# EAGLE board CT_schematic (EAGLE 7.6.0)

Size 100 x 80 mm. Coordinates in mm from the lower left corner, seen from the top.
Outline: 0,0 100,0 100,80 0,80 0,0
Copper layers (1*16): Top 0.035mm / dielectric 1.5mm / Bottom 0.035mm
Design rules "default": minimum track width 10mil, minimum drill 24mil, track to track 8mil, track to pad 8mil, pad to pad 8mil, via to via 8mil, smd to smd 8mil, copper to edge 40mil, drill to drill 8mil, minimum pad ring 10mil, minimum via ring 8mil, stop-mask expansion 4mil, vias tented up to drill 0mil, thermal gap 10mil

## Footprints (pad centres in the part's own frame; a part is rotated, then mirrored left to right if it is on the bottom)
C0603 = smd 0.8 x 0.8: 1 -0.762,0; 2 0.762,0
C0402 = smd 0.5 x 0.5: 1 -0.508,0; 2 0.508,0
C1210 = smd 1.2 x 2.5: 1 -1.524,0; 2 1.524,0
EXV-9H = smd 3.505 x 1.676: 1 -2.857,0; 2 2.857,0
L0603 = smd 0.8 x 0.8: 1 -0.762,0; 2 0.762,0
PJ-037B_PACKAGE = drill 3.7 square: 1 12,0 | drill 3.2 square: 2 6,0
R0603 = smd 0.8 x 0.8: 1 -0.762,0; 2 0.762,0
LFBGA100 = smd 0.52 x 0.52: A1 -3.6,3.6; A2 -2.8,3.6; A3 -2,3.6; A4 -1.2,3.6; A5 -0.4,3.6; A6 0.4,3.6; A7 1.2,3.6; A8 2,3.6; A9 2.8,3.6; A10 3.6,3.6; B1 -3.6,2.8; B2 -2.8,2.8; B3 -2,2.8; B4 -1.2,2.8; B5 -0.4,2.8; B6 0.4,2.8; B7 1.2,2.8; B8 2,2.8; B9 2.8,2.8; B10 3.6,2.8; C1 -3.6,2; C2 -2.8,2; C3 -2,2; C4 -1.2,2; C5 -0.4,2; C6 0.4,2; C7 1.2,2; C8 2,2; C9 2.8,2; C10 3.6,2; D1 -3.6,1.2; D2 -2.8,1.2; D3 -2,1.2; D4 -1.2,1.2; D5 -0.4,1.2; D6 0.4,1.2; D7 1.2,1.2; D8 2,1.2; D9 2.8,1.2; D10 3.6,1.2; E1 -3.6,0.4; E2 -2.8,0.4; E3 -2,0.4; E4 -1.2,0.4; E5 -0.4,0.4; E6 0.4,0.4; E7 1.2,0.4; E8 2,0.4; E9 2.8,0.4; E10 3.6,0.4; F1 -3.6,-0.4; F2 -2.8,-0.4; F3 -2,-0.4; F4 -1.2,-0.4; F5 -0.4,-0.4; F6 0.4,-0.4; F7 1.2,-0.4; F8 2,-0.4; F9 2.8,-0.4; F10 3.6,-0.4; G1 -3.6,-1.2; G2 -2.8,-1.2; G3 -2,-1.2; G4 -1.2,-1.2; G5 -0.4,-1.2; G6 0.4,-1.2; G7 1.2,-1.2; G8 2,-1.2; G9 2.8,-1.2; G10 3.6,-1.2; H1 -3.6,-2; H2 -2.8,-2; H3 -2,-2; H4 -1.2,-2; H5 -0.4,-2; H6 0.4,-2; H7 1.2,-2; H8 2,-2; H9 2.8,-2; H10 3.6,-2; J1 -3.6,-2.8; J2 -2.8,-2.8; J3 -2,-2.8; J4 -1.2,-2.8; J5 -0.4,-2.8; J6 0.4,-2.8; J7 1.2,-2.8; J8 2,-2.8; J9 2.8,-2.8; J10 3.6,-2.8; K1 -3.6,-3.6; K2 -2.8,-3.6; K3 -2,-3.6; K4 -1.2,-3.6; K5 -0.4,-3.6; K6 0.4,-3.6; K7 1.2,-3.6; K8 2,-3.6; K9 2.8,-3.6; K10 3.6,-3.6
SSOP-28 = smd 1.5 x 0.4: 1 -3.625,4.225; 2 -3.625,3.575; 3 -3.625,2.925; 4 -3.625,2.275; 5 -3.625,1.625; 6 -3.625,0.975; 7 -3.625,0.325; 8 -3.625,-0.325; 9 -3.625,-0.975; 10 -3.625,-1.625; 11 -3.625,-2.275; 12 -3.625,-2.925; 13 -3.625,-3.575; 14 -3.625,-4.225; 15 3.625,-4.225; 16 3.625,-3.575; 17 3.625,-2.925; 18 3.625,-2.275; 19 3.625,-1.625; 20 3.625,-0.975; 21 3.625,-0.325; 22 3.625,0.325; 23 3.625,0.975; 24 3.625,1.625; 25 3.625,2.275; 26 3.625,2.925; 27 3.625,3.575; 28 3.625,4.225
182-009-MALE = drill 1.194 pad 1.524 octagon: 1 -5.537,10.923; 2 -2.769,10.923; 3 0,10.923; 4 2.769,10.923; 5 5.537,10.923; 6 -4.153,8.08; 7 -1.384,8.08; 8 1.384,8.08; 9 4.153,8.08 | hole 3.048: -12.446,9.501; 12.446,9.501
FCI_10118193-0001LF = smd 0.4 x 1.35: 1 -1.3,2.675; 2 -0.65,2.675; 3 0,2.675; 4 0.65,2.675; 5 1.3,2.675 | smd 1.6 x 1.4: 6 -3.2,2.45; 7 3.2,2.45 | smd 1.9 x 1.9: 8 -1.2,0; 9 1.2,0 | hole 0.5: -3.3,0; 3.3,0
SOT143B = smd 1 x 0.7: 1 -0.75,-1 | smd 0.6 x 0.7: 2 0.95,-1; 3 0.95,1; 4 -0.95,1
ABLS-25.000MHZ-B2F-T = smd 5.6 x 2.8: 1 -3.81,0; 2 5.69,0
ASEK = smd 1.4 x 1: 1 -1.1,-0.8; 2 1.1,-0.8; 3 1.1,0.8; 4 -1.1,0.8
WSON-8 = smd 0.3 x 0.6: 1 -0.75,0; 2 0.05,0; 3 0.85,0; 4 1.65,0; 5 1.65,3.8; 6 0.85,3.8; 7 0.05,3.8; 8 -0.75,3.8 | smd 3 x 2.6: PAD 0.45,1.9
SON-6 = smd 0.55 x 0.3: 1 -0.355,0.5 | smd 0.52 x 0.3: 2 -0.37,0; 3 -0.37,-0.5; 4 0.37,-0.5; 5 0.37,0; 6 0.37,0.5
SW_4-1437565-2 = smd 1.4 x 2.1: 1 -2.23,4.55; 2 -2.23,-4.55; 3 2.23,4.55; 4 2.23,-4.55
LGM67K-G1J2-24-Z = smd 0.8 x 1.4: A -2,0; C 0,0
NC7SZ125M5X = smd 1.3 x 0.7: 1 -1.3,0.95; 2 -1.3,0; 3 -1.3,-0.95; 4 1.3,-0.95; 5 1.3,0.95
DUMMY_PACKAGE_110 = drill 0.3: 1 0,-1; 2 1.5,-1; 3 3,-1

## Placement (x,y rotation side)
C1  1e-06  [C0603]  -15.24,62.23 0 top  (outside the outline)
C2  1e-07  [C0603]  -19.05,62.23 0 top  (outside the outline)
C3  1e-07  [C0603]  -22.86,62.23 0 top  (outside the outline)
C4  1e-07  [C0603]  -26.67,62.23 0 top  (outside the outline)
C5  1e-07  [C0603]  -30.48,62.23 0 top  (outside the outline)
C6  1e-07  [C0603]  -34.29,62.23 0 top  (outside the outline)
C7  1e-07  [C0603]  -38.1,62.23 0 top  (outside the outline)
C8  4.7e-06  [C0603]  -68.58,55.88 0 top  (outside the outline)
C9  1e-08  [C0603]  -41.91,62.23 0 top  (outside the outline)
C10  1e-06  [C0603]  -45.72,62.23 0 top  (outside the outline)
C11  1e-11  [C0402]  -15.24,67.31 0 top  (outside the outline)
C12  1e-11  [C0402]  -19.05,67.31 0 top  (outside the outline)
C13  1e-07  [C0402]  -22.86,67.31 0 top  (outside the outline)
C14  1e-07  [C0402]  -26.67,67.31 0 top  (outside the outline)
C15  1e-07  [C0402]  -30.48,67.31 0 top  (outside the outline)
C16  1e-07  [C0402]  -34.29,67.31 0 top  (outside the outline)
C17  1e-07  [C0402]  -38.1,67.31 0 top  (outside the outline)
C18  1e-08  [C0402]  -41.91,67.31 0 top  (outside the outline)
C19  1e-08  [C0402]  -45.72,67.31 0 top  (outside the outline)
C20  1e-05  [C1210]  -16.51,57.15 0 top  (outside the outline)
C21  1e-05  [C1210]  -22.86,57.15 0 top  (outside the outline)
C22  1e-07  [C0402]  -49.53,67.31 0 top  (outside the outline)
C23  0.0001  [EXV-9H]  -17.78,49.53 0 top  (outside the outline)
C24  0.0001  [EXV-9H]  -29.21,49.53 0 top  (outside the outline)
C25  1e-08  [C0402]  -53.34,67.31 0 top  (outside the outline)
F1  240.0  [L0603]  -49.53,62.23 0 top  (outside the outline)
J1  PJ-037B  [PJ-037B_PACKAGE]  -43.18,29.21 0 top  (outside the outline)
R2  1000.0  [R0603]  -53.34,62.23 0 top  (outside the outline)
R4  4700.0  [R0603]  -57.15,62.23 0 top  (outside the outline)
R5  10000.0  [R0603]  -54.61,55.88 0 top  (outside the outline)
R6  100000.0  [R0603]  -34.29,55.88 0 top  (outside the outline)
R7  100000.0  [R0603]  -39.37,55.88 0 top  (outside the outline)
R8  2231.0  [R0603]  -60.96,62.23 0 top  (outside the outline)
R9  1000.0  [R0603]  -64.77,62.23 0 top  (outside the outline)
R10  10000.0  [R0603]  -59.69,55.88 0 top  (outside the outline)
R11  10000.0  [R0603]  -64.77,55.88 0 top  (outside the outline)
R12  9100.0  [R0603]  -68.58,62.23 0 top  (outside the outline)
R13  680000.0  [R0603]  -44.45,55.88 0 top  (outside the outline)
R14  120000.0  [R0603]  -49.53,55.88 0 top  (outside the outline)
U1  stm32f103v8h7  [LFBGA100]  -22.86,29.21 0 top  (outside the outline)
U2  ST3241EBPR  [SSOP-28]  -58.42,7.62 0 top  (outside the outline)
U3  182-009-113R531  [182-009-MALE]  -36.83,6.35 0 top  (outside the outline)
U4  10118193-0001LF  [FCI_10118193-0001LF]  -38.1,40.64 0 top  (outside the outline)
U5  prtr5v0u2ax  [SOT143B]  -66.04,67.31 0 top  (outside the outline)
U6  ABLS-25.000MHZ-B2F-T  [ABLS-25.000MHZ-B2F-T]  -48.26,49.53 0 top  (outside the outline)
U7  ASEK-32.768KHz-ECST  [ASEK]  -59.69,40.64 0 top  (outside the outline)
U8  LP3878SDX-ADJ/NOPB  [WSON-8]  -30.48,39.37 0 top  (outside the outline)
U9  TPS3895ADRYR  [SON-6]  -20.32,71.12 0 top  (outside the outline)
U10  4-1437565-2  [SW_4-1437565-2]  -59.69,27.94 0 top  (outside the outline)
U11  Q65110A2395  [LGM67K-G1J2-24-Z]  -59.69,49.53 0 top  (outside the outline)
U12  nc7sz125m5x  [NC7SZ125M5X]  -27.94,55.88 0 top  (outside the outline)
U13  Dummy  [DUMMY_PACKAGE_110]  -17.78,72.39 0 top  (outside the outline)

## Library data of the parts
C1-C25 F1 J1 R2 R4-R14 U1-U13 = circuit_tree

## Nets
CLK_CRYSTAL_U1_C1: C11.1 U1.C1 U6.1
CLK_CRYSTAL_U1_D1: C12.1 U1.D1 U6.2
CLK_U1_A1: U1.A1 U7.3
GND: C1.2 C2.2 C3.2 C4.2 C5.2 C6.2 C7.2 C8.2 C9.2 C10.2 C11.2 C12.2 C13.2 C16.2 C17.2 C18.2 C19.2 C20.2 C21.2 C22.2 C23.2 C24.2 C25.2 J1.2 R2.2 R5.2 R9.2 R12.2 R14.2 U1.C2 U1.E4 U1.E5 U1.E6 U1.E7 U1.G1 U1.H1 U2.23 U2.25 U3.5 U4.5 U4.6 U4.7 U4.8 U4.9 U5.1 U7.2 U8.3 U8.PAD U9.2 U11.C U12.1 U12.3 U13.1
NET_U1_D5: R5.1 U1.D5
NET_U1_E1: R4.1 U1.E1 U12.4
NET_U1_K1: C9.1 C10.1 F1.1 U1.J1 U1.K1
NET_U1_K9: U11.A
NET_U1_K10: U10.3 U10.4
NET_U2_1: C15.1 U2.1
NET_U2_2: C15.2 U2.2
NET_U2_3: C17.1 U2.3
NET_U2_22: R6.1 U2.22
NET_U2_24: C14.2 U2.24
NET_U2_27: C16.1 U2.27
NET_U2_28: C14.1 U2.28
NET_U3_2: U2.4 U3.2
NET_U3_3: U2.9 U3.3
NET_U3_7: U2.5 U3.7
NET_U3_8: U2.10 U3.8
NET_U5_4: U4.1 U5.4
NET_U8_1: C19.1 U8.1
NET_U8_6: R8.2 R9.1 U8.6
NET_U8_8: R7.1 U8.8
NET_U9_1: R11.1 R12.1 U9.1
NET_U9_3: R13.2 R14.1 U9.3
NET_U9_4: R10.1 U9.4 U12.2
NET_U10_1: R2.1 U10.1 U10.2
PROC_ADC1_IN1: U1.H2 U13.3
PROC_ADC1_IN2: U1.J2 U13.2
PROC_USART2_CTS: U1.C7 U2.13
PROC_USART2_RTS: U1.D7 U2.18
PROC_USART2_RX: U1.C6 U2.19
PROC_USART2_TX: U1.B6 U2.14
PROC_USB_DM: U1.C10 U4.2 U5.3
PROC_USB_DP: U1.B10 U4.3 U5.2
VCC_S1_14V8: C20.1 C23.1 C24.1 J1.1 R7.2 U8.4
VCC_TIER1_3V3: C1.1 C2.1 C3.1 C4.1 C5.1 C6.1 C7.1 C8.1 C13.1 C18.1 C21.1 C22.1 C25.1 F1.2 R4.2 R6.2 R8.1 R10.2 R11.2 R13.1 U1.B2 U1.D2 U1.F4 U1.F5 U1.F6 U1.F7 U2.26 U7.4 U8.5 U9.6 U12.5

## Tracks (layer width: path | path; a pad name or v marks a point on that pad's centre or on a via)
CLK_CRYSTAL_U1_C1  (2 unrouted)
CLK_CRYSTAL_U1_D1  (2 unrouted)
CLK_U1_A1  (1 unrouted)
GND  (52 unrouted)
NET_U1_D5  (1 unrouted)
NET_U1_E1  (2 unrouted)
NET_U1_K1  (4 unrouted)
NET_U1_K10  (1 unrouted)
NET_U2_1  (1 unrouted)
NET_U2_2  (1 unrouted)
NET_U2_3  (1 unrouted)
NET_U2_22  (1 unrouted)
NET_U2_24  (1 unrouted)
NET_U2_27  (1 unrouted)
NET_U2_28  (1 unrouted)
NET_U3_2  (1 unrouted)
NET_U3_3  (1 unrouted)
NET_U3_7  (1 unrouted)
NET_U3_8  (1 unrouted)
NET_U5_4  (1 unrouted)
NET_U8_1  (1 unrouted)
NET_U8_6  (2 unrouted)
NET_U8_8  (1 unrouted)
NET_U9_1  (2 unrouted)
NET_U9_3  (2 unrouted)
NET_U9_4  (2 unrouted)
NET_U10_1  (2 unrouted)
PROC_ADC1_IN1  (1 unrouted)
PROC_ADC1_IN2  (1 unrouted)
PROC_USART2_CTS  (1 unrouted)
PROC_USART2_RTS  (1 unrouted)
PROC_USART2_RX  (1 unrouted)
PROC_USART2_TX  (1 unrouted)
PROC_USB_DM  (2 unrouted)
PROC_USB_DP  (2 unrouted)
VCC_S1_14V8  (5 unrouted)
VCC_TIER1_3V3  (30 unrouted)